# Altium PCB roneCPUBoard-v10.PcbDoc (part 1 of 3)
Units mil, origin at the board's own origin, x right, y up, seen from the top; angles counter-clockwise.
Board outline 3915.26 x 3915.56 mil, 2 copper layers (Top Layer, Bottom Layer); 196 components, 156 nets, 740 pads, 425 vias.
Unrouted connection lines stored in the file: 1.
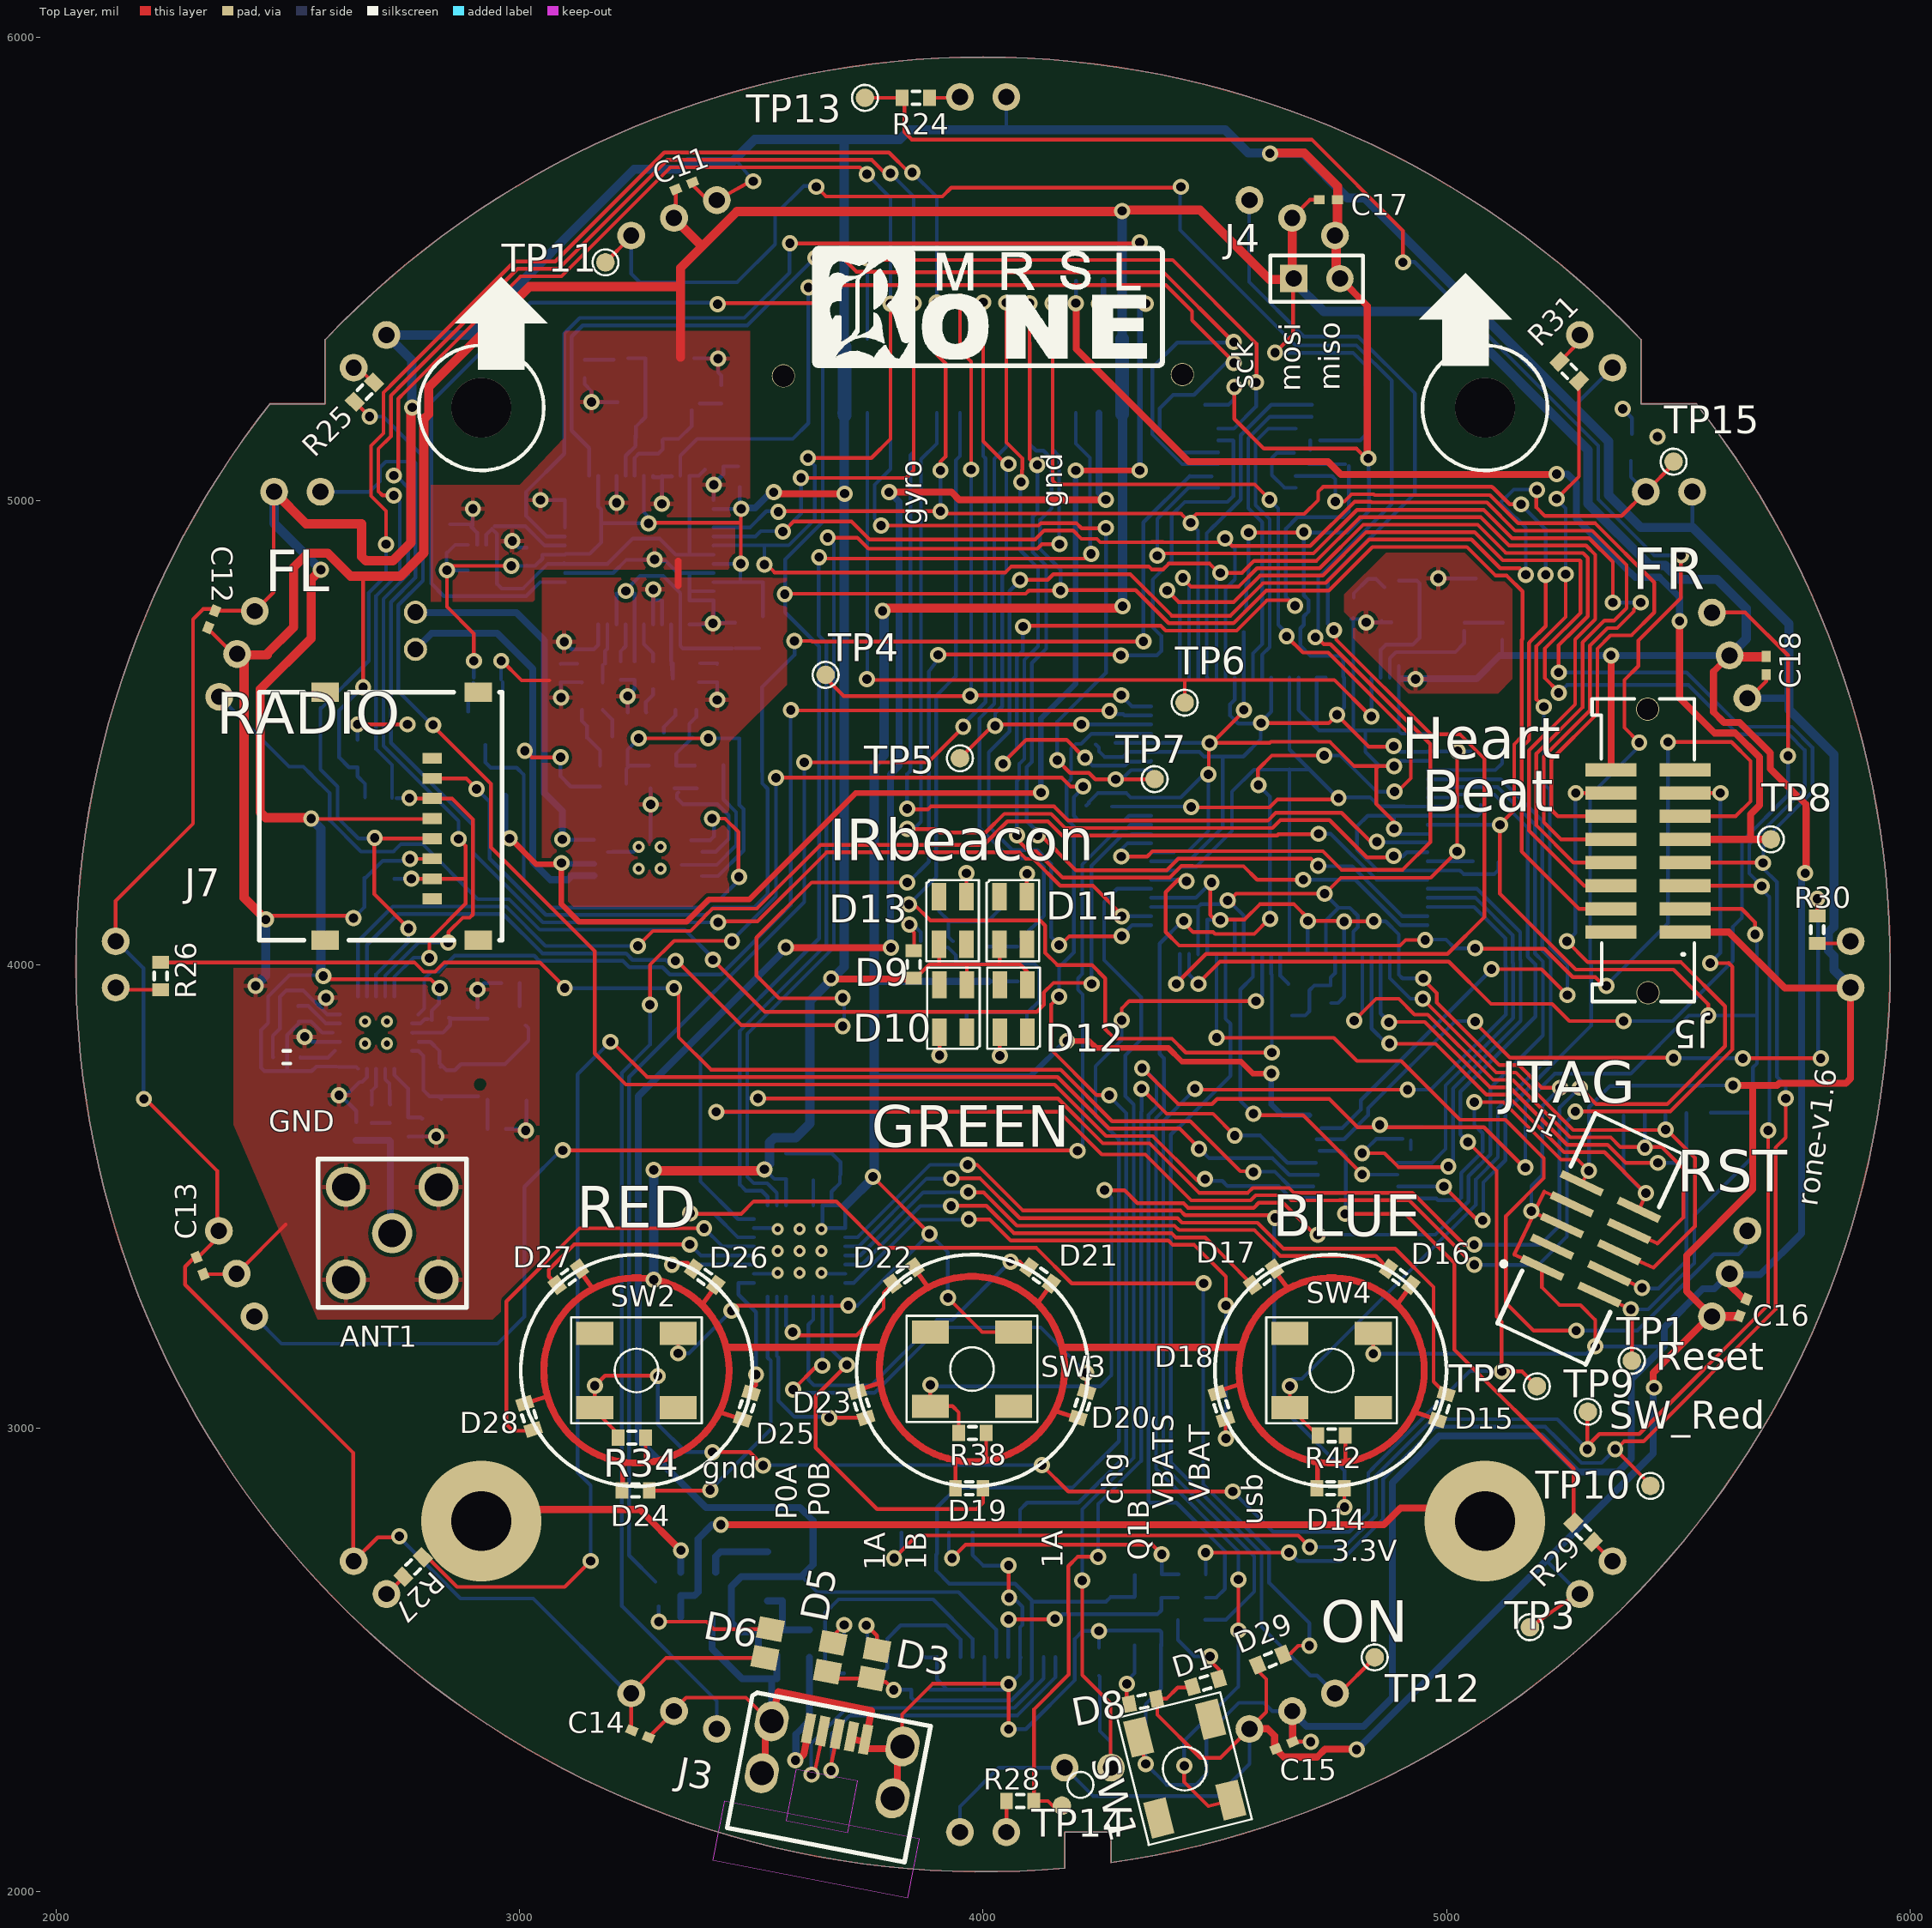
[diagram p0: Top Layer view]
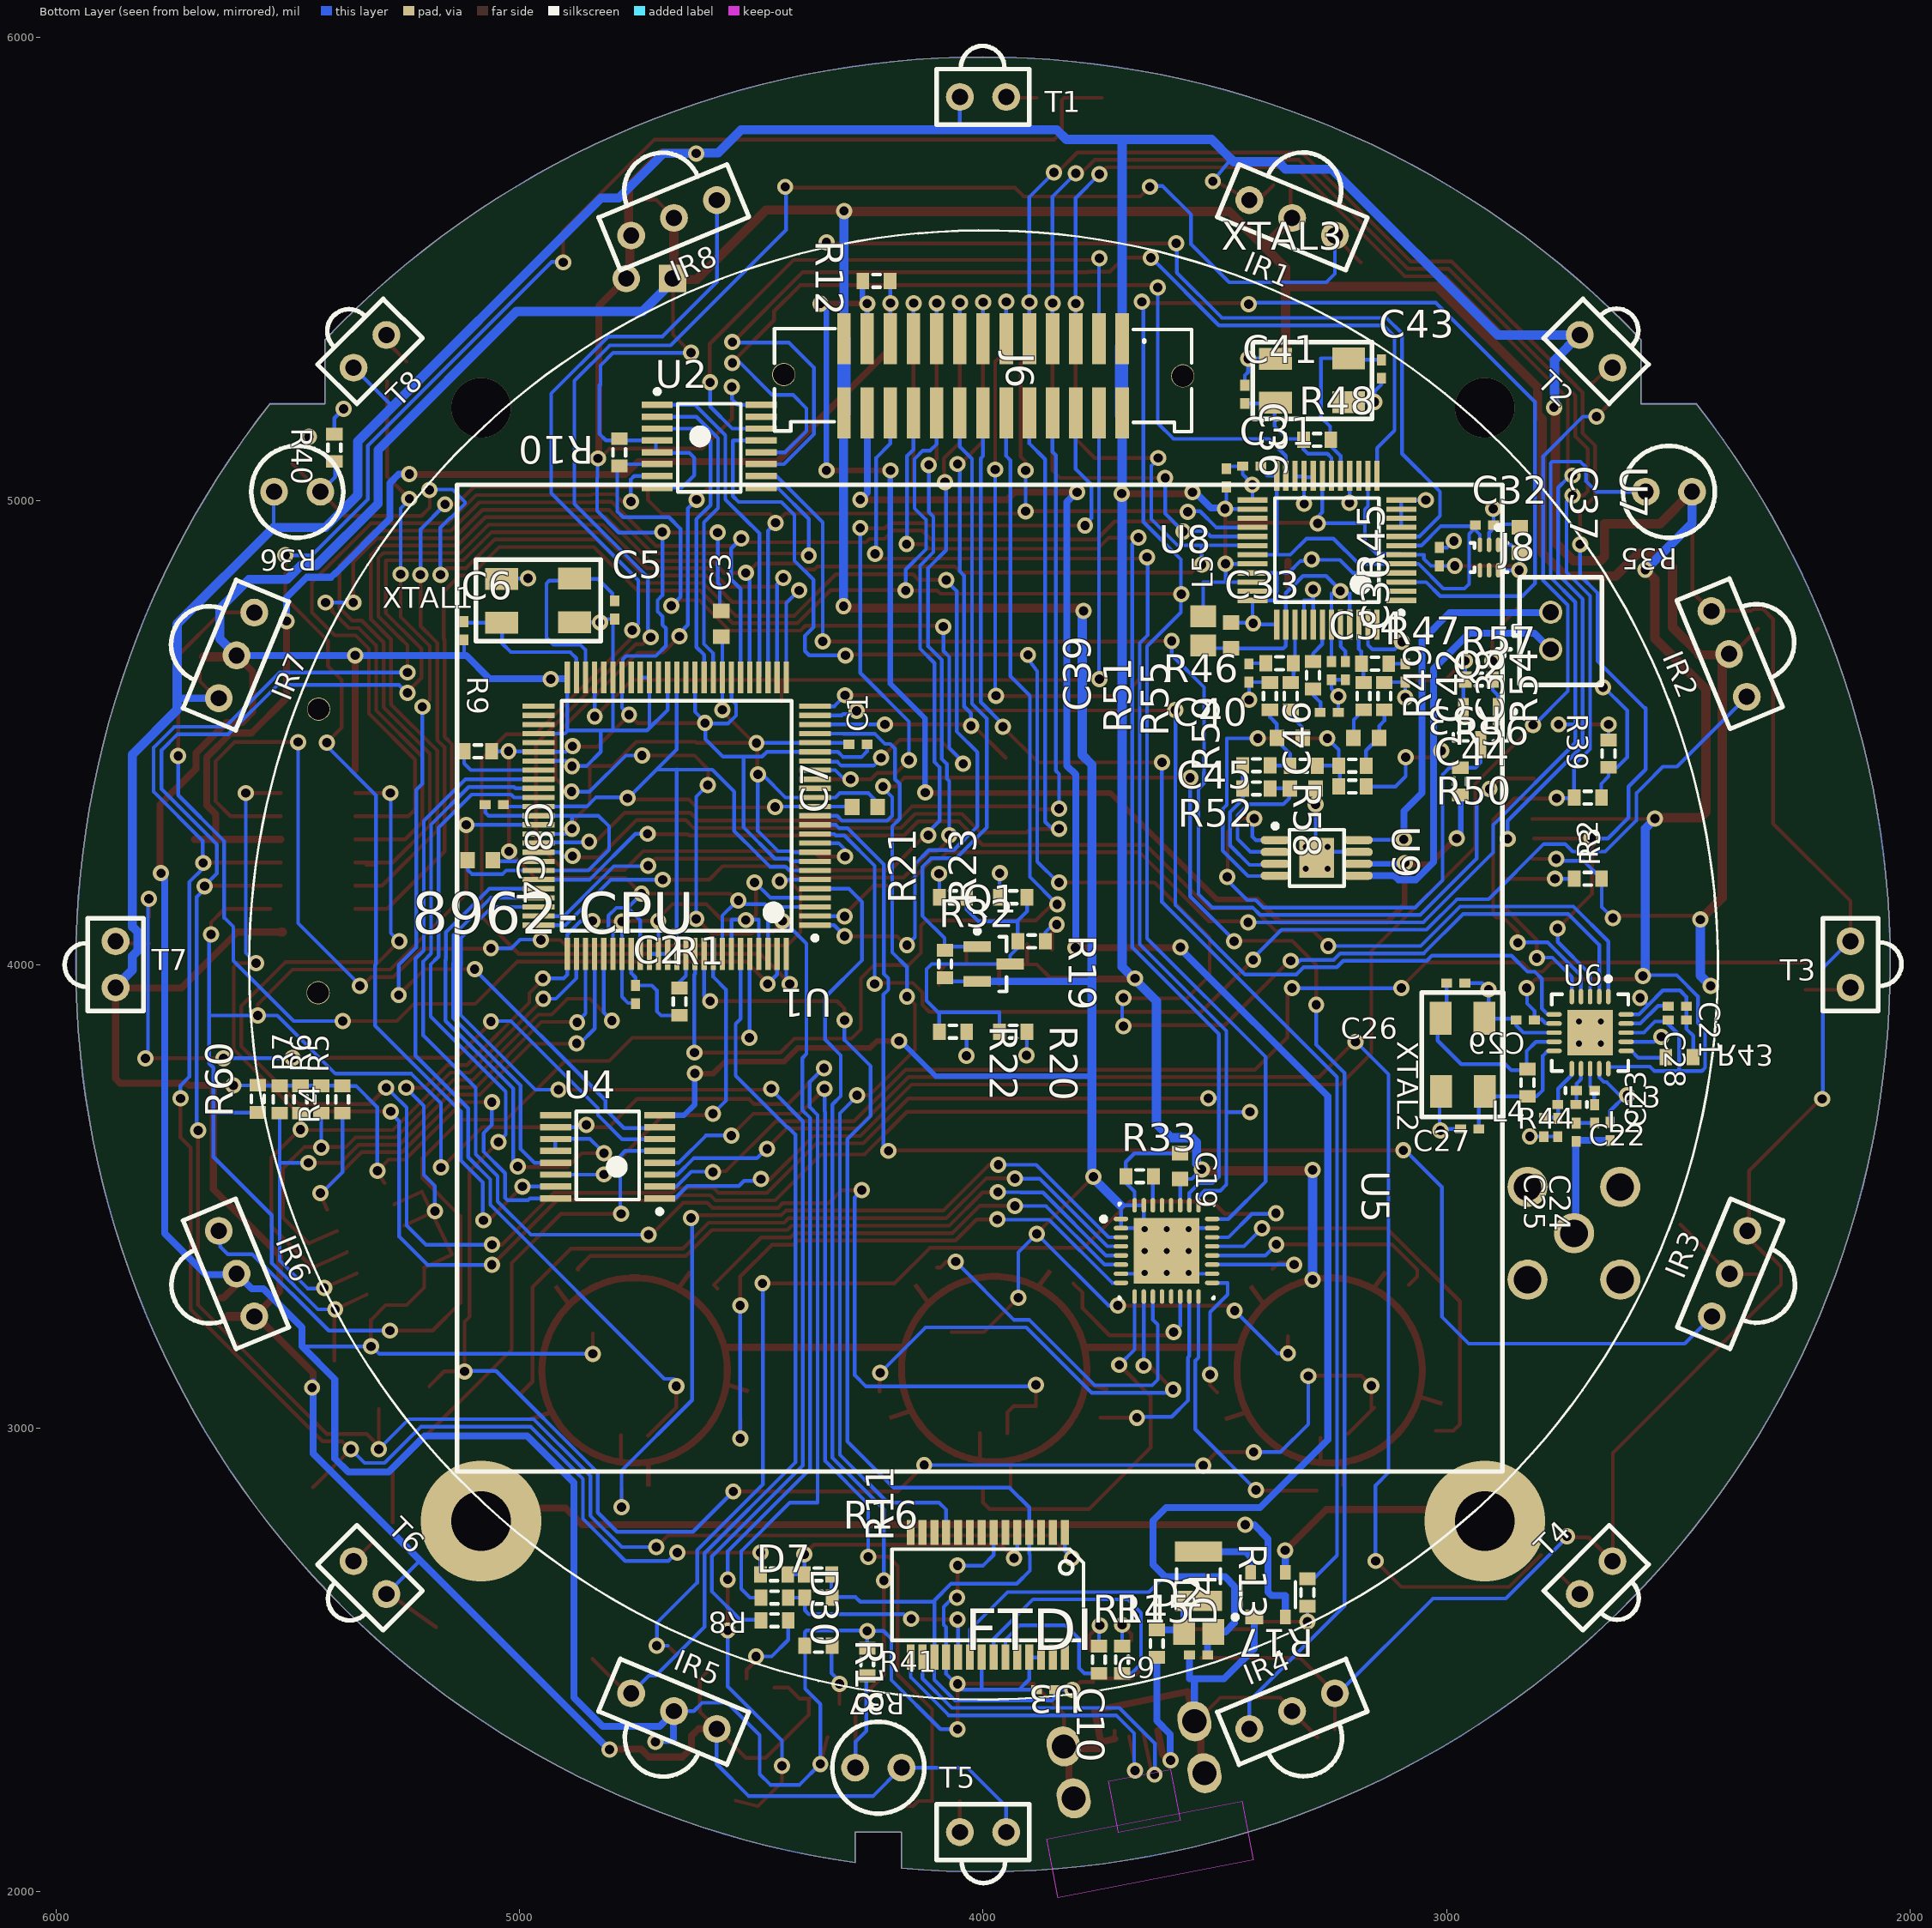
[diagram p1: Bottom Layer view, seen from below]

## Layer stack, top to bottom
Top Layer: signal copper 1.4
Dielectric: dielectric 12.6, FR-4, Dk 4.8
Bottom Layer: signal copper 1.4

## Board outline
4175.97,2050.22 cw(c4000,4000) 2460.99,5209.99 2461,5210 2580,5210 2580,5348 cw(c4000,4000) 5420,5348 5420,5210 5539,5210 5538.89,5209.9 cw(c4000,4000) 4275.99,2062 4276,2062 4276,2128 4176,2128

## Design rules (kind name [scope] priority, off if disabled: settings)
Clearance [All] p1: gap=8
PolygonConnect [All] p1: connectstyle=Relief reliefconductorwidth=10 reliefentries=4 polygonreliefangle="90 Angle"
RoomDefinition TestPoints [InComponentClass('TestPoints')] p1: confinementstyle=ConfineIn formatcopy=TRUE lockcomponents=FALSE outline 0,0 2000,0 2000,1000 0,1000
RoomDefinition USBHeaders [InComponentClass('USBHeaders')] p2: confinementstyle=ConfineIn formatcopy=TRUE lockcomponents=FALSE outline 0,0 2000,0 2000,1000 0,1000
RoomDefinition SoundChip [InComponentClass('SoundChip')] p3: confinementstyle=ConfineIn formatcopy=TRUE lockcomponents=FALSE outline 0,0 2000,0 2000,1000 0,1000
RoomDefinition Radio [InComponentClass('Radio')] p4: confinementstyle=ConfineIn formatcopy=TRUE lockcomponents=FALSE outline 0,0 2000,0 2000,1000 0,1000
RoomDefinition LightSensorsButtons [InComponentClass('LightSensorsButtons')] p5: confinementstyle=ConfineIn formatcopy=TRUE lockcomponents=FALSE outline 0,0 2000,0 2000,1000 0,1000
RoomDefinition LEDs [InComponentClass('LEDs')] p6: confinementstyle=ConfineIn formatcopy=TRUE lockcomponents=FALSE outline 0,0 2000,0 2000,1000 0,1000
RoomDefinition IRComms [InComponentClass('IRComms')] p7: confinementstyle=ConfineIn formatcopy=TRUE lockcomponents=FALSE outline 0,0 2000,0 2000,1000 0,1000
RoomDefinition CPU [InComponentClass('CPU')] p8: confinementstyle=ConfineIn formatcopy=TRUE lockcomponents=FALSE outline 0,0 2000,0 2000,1000 0,1000
RoutingVias [All] p1: holewidth=20 width=35 viastyle="Through Hole" minholewidth=20 minwidth=35 maxholewidth=20 maxwidth=35
SMDNeckDown [All] p1: percent=400.000
SilkscreenOverComponentPads [All] p1: minsilkscreentomaskgap=10
SolderMaskExpansion [All] p1: expansion=4
Width "Schematic Width Constraint_11" [InNet('5V_BOOST')] p1: maxlimit=20 minlimit=8 preferedwidth=15 minimp=50.000000 maximp=50.000000 favimp=50.000000
Width "Schematic Width Constraint_10" [InNet('GND')] p2: maxlimit=20 minlimit=8 preferedwidth=15 minimp=50.000000 maximp=50.000000 favimp=50.000000
Width "Schematic Width Constraint_9" [InNet('PRONG2')] p3: maxlimit=15 minlimit=8 preferedwidth=8 minimp=50.000000 maximp=50.000000 favimp=50.000000
Width "Schematic Width Constraint_8" [InNet('PRONG1')] p4: maxlimit=15 minlimit=8 preferedwidth=8 minimp=50.000000 maximp=50.000000 favimp=50.000000
Width "Schematic Width Constraint_6" [InNet('NetD2_1')] p5: maxlimit=15 minlimit=8 preferedwidth=8 minimp=50.000000 maximp=50.000000 favimp=50.000000
Width "Schematic Width Constraint_2" [InNet('NetD2_2')] p6: maxlimit=15 minlimit=8 preferedwidth=8 minimp=50.000000 maximp=50.000000 favimp=50.000000
Width "Schematic Width Constraint_1" [InNet('5VUSB')] p7: maxlimit=15 minlimit=8 preferedwidth=8 minimp=50.000000 maximp=50.000000 favimp=50.000000
Width "Schematic Width Constraint" [InNet('GND')] p8: maxlimit=15 minlimit=8 preferedwidth=8 minimp=50.000000 maximp=50.000000 favimp=50.000000
Width "Schematic Width Constraint_7" [InNet('3.3V')] p9: maxlimit=20 minlimit=8 preferedwidth=15 minimp=50.000000 maximp=50.000000 favimp=50.000000
Width "Schematic Width Constraint_5" [InNet('NetANT1_1')] p10: maxlimit=20 minlimit=8 preferedwidth=15 minimp=50.000000 maximp=50.000000 favimp=50.000000
Width "Schematic Width Constraint_4" [InNet('NetJ8_1')] p11: maxlimit=20 minlimit=8 preferedwidth=15 minimp=50.000000 maximp=50.000000 favimp=50.000000
Width "Schematic Width Constraint_3" [InNet('NetJ8_2')] p12: maxlimit=20 minlimit=8 preferedwidth=15 minimp=50.000000 maximp=50.000000 favimp=50.000000
Width [All] p13: maxlimit=8 minlimit=8 preferedwidth=8
27 further rules are at their usual default settings.

## Classes and differential pairs
component class TestPoints: TP2 TP3 TP4 TP5 TP6 TP7 TP8 TP9 TP10 TP11 TP12 TP13 TP14 TP15
component class USBHeaders: C9 C10 D2 D3 D4 D5 D6 D7 D8 D30 J2 J3 J4 J5 J6 J7 L1 Q? R11 R12 R13 R14 R15 R16 R17 R18 SW1 U3 VDDC
component class LightSensorsButtons: R34 R35 R36 R37 R38 R39 R40 R41 R42 SW2 SW3 SW4
component class IRComms: C11 C12 C13 C14 C15 C16 C17 C18 D9 D10 D11 D12 D13 IR1 IR2 IR3 IR4 IR5 IR6 IR7 IR8 Q1 R19 R20 R21 R22 R23 R24 R25 R26 R27 R28 R29 R30 R31 R32 T1 T2 T3 T4 T5 T6 T7 T8 U4 U10
component class CPU: C1 C2 C3 C4 C5 C6 C7 C8 D1 D? I2C IR_BEACON J1 "LED1 Power" "LED2 USB" "LED-H Blinky" LEDs R1 R2 R3 R4 R5 R6 R7 R8 R9 R10 R60 R? RST SPI SW? SW_RED TP1 U0 U1 U2 XTAL1 "XTAL 1"
component class LEDs: C19 D14 D15 D16 D17 D18 D19 D20 D21 D22 D23 D24 D25 D26 D27 D28 D29 R33 TP? U5
component class Radio: ANT1 C21 C22 C23 C24 C25 C26 C27 C28 C29 L2 L3 L4 R43 R44 U6 XTAL2
component class SoundChip: C30 C31 C32 C33 C34 C36 C37 C38 C39 C40 C41 C42 C43 C44 C45 C46 C? J8 L5 Q2 R45 R46 R47 R48 R49 R50 R51 R52 R53 R54 R55 R56 R57 R58 R59 U7 U8 U9 XTAL3 XTAL100

## Components (designator, comment, footprint, x,y, rotation, side; value= is the part's Value field where it differs from the comment)
ANT1 "Ant" AntennaSMA 2725,3420 r90 top locked
C1 "Cap Semi" CAPC1005L#1 4270,4475 r180 bottom
C2 "Cap Semi" CAPC1005L#1 4750,3935 r90 bottom
C3 "Cap Semi" CAPC1608L 4565,4735 r90 bottom
C4 "Cap Semi" CAPC1608L 5085,4225 r180 bottom
C5 "Cap Semi" CAPC1005L#1 4795,4765 r90 bottom
C6 "Cap Semi" CAPC1005L#1 5120,4720 r90 bottom
C7 "Cap Semi" CAPC1608L 4255,4340 r0 bottom
C8 "Cap Semi" CAPC1005L#1 5055,4345 r180 bottom
C9 "" CAPC1005L#1 3535,2510 r180 bottom
C10 "" CAPC1005L#1 3865,2435 r180 bottom
C11 "Cap Semi" CAPC1005L#1 3355,5680 r22.5 top
C12 "Cap Semi" CAPC1005L#1 2335,4745 r67.5 top
C13 "Cap Semi" CAPC1005L#1 2310,3350 r112.5 top
C14 "Cap Semi" CAPC1005L#1 3260,2340 r157.5 top
C15 "Cap Semi" CAPC1005L#1 4650,2315 r202.5 top
C16 "Cap Semi" CAPC1005L#1 5640,3260 r247.5 top
C17 "Cap Semi" CAPC1005L#1 4745,5650 r0 top
C18 "Cap Semi" CAPC1005L#1 5690,4645 r270 top
C19 "Cap Semi" CAPC1608L 3575,3565 r270 bottom
C21 "Cap Semi" CAPC1005L#1 2502,3910 r0 bottom
C22 "Cap Semi" CAPC1005L#1 2720,3638 r90 bottom
C23 "Cap Semi" CAPC1005L#1 2647,3640 r270 bottom
C24 "Cap Semi" CAPC1005L#1 2760,3648 r90 bottom
C25 "Cap Semi" CAPC1005L#1 2790,3648 r90 bottom
C26 "Cap Semi" CAPC1005L#1 2980,3960 r0 bottom
C27 "Cap Semi" CAPC1005L#1 2950,3645 r180 bottom
C28 "Cap Semi" CAPC1005L#1 2502,3880 r0 bottom
C29 "Cap Semi" CAPC1005L#2 2830,3880 r180 top
C30 "Cap Semi" CAPC1608L 2842,4916 r90 bottom
C31 "Cap Semi" CAPC1005L#1 3420,5075 r180 bottom
C32 "Cap Semi" CAPC1005L#1 2918,4948 r0 bottom
C33 "Cap Semi" CAPC1608L 3465,4710 r90 bottom
C34 "Cap Semi" CAPC1005L#1 3248,4634 r90 bottom
C36 "Cap Semi" CAPC1005L#1 3475,5050 r270 bottom
C37 "Cap Semi" CAPC1005L#1 3015,4880 r270 bottom
C38 "Cap Semi" CAPC1005L#1 3089,4629 r270 bottom
C39 "Cap Semi" CAPC1005L#1 3426,4629 r270 bottom
C40 "Cap Semi" CAPC1005L#1 3253,4544 r180 bottom
C41 "Cap Semi" CAPC1005L#1 3435,5230 r90 bottom
C42 "Cap Semi" CAPC1005L#1 3218,4634 r90 bottom
C43 "Cap Semi" CAPC1005L#1 3140,5285 r270 bottom
C44 "Cap Semi" CAPC1608L 3173,4489 r0 bottom
C45 "Cap Semi" CAPC1608L 3338,4489 r180 bottom
C46 "Cap Semi" CAPC1608L 3310,4380 r0 bottom
D1 "heartbeat (white)" SurfaceMount(603) 4480,2450 r16.7 top
D2 "Diode" SurfaceMount(603) 3625,2535 r270 bottom
D3 "TXLED" INDC2012L 3765,2490 r79.1 top
D4 "DIODE_ARRAY" SOT143 3385,2640 r90 bottom
D5 "RXLED" INDC2012L 3670,2505 r79.1 top
D6 "Charge" INDC2012L 3535,2535 r79.1 top
D7 "Diode" SurfaceMount(603) 4450,2634 r180 bottom
D8 "LED" SurfaceMount(603) 4345,2410 r190.9 top
D9 "BEACON_PILOT" SurfaceMount(603) 3850,4000 r90 top locked
D10 "IRBeacon" IRBeacon 3935,3905 r0 top locked
D11 "IRBeacon" IRBeacon 4065,4095 r180 top locked
D12 "IRBeacon" IRBeacon 4065,3905 r0 top locked
D13 "IRBeacon" IRBeacon 3935,4095 r180 top locked
D14 "blue" SurfaceMount(603) 4750,2870 r0 top locked
D15 "blue" SurfaceMount(603) 4990,3045 r72 top locked
D16 "blue" SurfaceMount(603) 4899,3326 r144 top locked
D17 "blue" SurfaceMount(603) 4605,3326 r216 top locked
D18 "blue" SurfaceMount(603) 4514,3047 r288 top locked
D19 "green" SurfaceMount(603) 3970,2870 r0 top locked
D20 "green" SurfaceMount(603) 4214,3050 r72 top locked
D21 "green" SurfaceMount(603) 4123,3329 r144 top locked
D22 "green" SurfaceMount(603) 3829,3329 r216 top locked
D23 "green" SurfaceMount(603) 3738,3050 r288 top locked
D24 "red" SurfaceMount(603) 3250,2865 r0 top locked
D25 "red" SurfaceMount(603) 3490,3047 r72 top locked
D26 "red" SurfaceMount(603) 3399,3326 r144 top locked
D27 "red" SurfaceMount(603) 3105,3326 r216 top locked
D28 "red" SurfaceMount(603) 3020,3025 r288 top locked
D29 "LED_MSP430" SurfaceMount(603) 4620,2500 r22.5 top
D30 "Diode" SurfaceMount(603) 4451,2684 r180 bottom
IR1 "GP1UX31QS" GP1UX31QS 3333,5611 r292.5 bottom locked
IR2 "GP1UX31QS" GP1UX31QS 2390,4670 r337.5 bottom locked
IR3 "GP1UX31QS" GP1UX31QS 2389,3333 r22.5 bottom locked
IR4 "GP1UX31QS" GP1UX31QS 3333,2389 r67.5 bottom locked
IR5 "GP1UX31QS" GP1UX31QS 4667,2389 r112.5 bottom locked
IR6 "GP1UX31QS" GP1UX31QS 5611,3333 r157.5 bottom locked
IR7 "GP1UX31QS" GP1UX31QS 5611,4667 r202.5 bottom locked
IR8 "GP1UX31QS" GP1UX31QS 4667,5611 r247.5 bottom locked
J1 "JTAG" JTAG-10 5311,3408 r245 top locked
J3 "USB" "USB Minib (thru-hole)" 3685,2340 r79.1 top
J4 "External Power" HDR1X2 4670,5480 r0 top
J5 "HEADER 8X2" "HEADERSM 8X2" 5435,4245 r180 top locked
J6 "HCOMM/MOT" "HeaderSM 13x2" 4000,5270 r270 bottom locked
J7 "Micro_SD" MICRO_SD 2700,4320 r90 top locked
J8 "Speaker" BatteryConnJST 2775,4720 r90 bottom
L1 "Inductor" INDC2012L 3535,2560 r180 bottom
L2 "Inductor" INDC1005AL 2680,3678 r270 bottom
L3 "Inductor" INDC1005AL 2700,3728 r180 bottom
L4 "Inductor" INDC1005AL 2740,3698 r0 bottom
L5 "Inductor" INDC2012L 3525,4720 r90 bottom
Q1 "Mosfet" SOT-23 3977,4001 r180 bottom
Q2 "Mosfet" SOT-23 2926,4510 r270 bottom
R1 "Res3" RESC1608L#1 4655,3920 r90 bottom
R2 "Res3" RESC1608L#1 2695,4185 r0 bottom
R3 "Res3" RESC1608L#1 2695,4360 r0 bottom
R4 "Res3" RESC1608L#1 5383,3709 r90 bottom
R5 "Res3" RESC1608L#1 5428,3709 r90 bottom
R6 "Res3" RESC1608L#1 5473,3709 r90 bottom
R7 "Res3" RESC1608L#1 5518,3709 r90 bottom
R8 "Res3" RESC1608L#1 4450,2585 r180 bottom
R9 "Res3" RESC1608L#1 5090,4460 r180 bottom
R10 "Res3" RESC1608L#1 4785,5105 r270 bottom
R11 "Res3" RESC1608L#1 4356,2684 r0 bottom
R12 "Res3" RESC1608L#1 4230,5475 r180 bottom
R13 "Res3" RESC3225L 3535,2680 r270 bottom
R14 "" RESC1608L#1 3750,2500 r90 bottom
R15 "" RESC1608L#1 3700,2500 r90 bottom
R16 "Res3" RESC1608L#1 4355,2634 r0 bottom
R17 "Res3" RESC1608L#1 3300,2645 r270 bottom
R18 "Res3" RESC1608L#1 4355,2530 r180 bottom
R19 "Res3" RESC1608L#1 3895,4050 r180 bottom
R20 "Res3" RESC1608L#1 3935,3855 r180 bottom
R21 "Res3" RESC1608L#1 4065,4145 r0 bottom
R22 "Res3" RESC1608L#1 4065,3855 r180 bottom
R23 "Res3" RESC1608L#1 3935,4145 r0 bottom
R24 "Res3" RESC1608L#1 3855,5870 r180 top
R25 "Res3" RESC1608L#1 2665,5235 r225 top
R26 "Res3" RESC1608L#1 2225,3975 r90 top
R27 "Res3" RESC1608L#1 2770,2700 r45 top
R28 "Res3" RESC1608L#1 4080,2195 r0 top
R29 "Res3" RESC1608L#1 5295,2775 r135 top
R30 "Res3" RESC1608L#1 5800,4075 r90 top
R31 "Res3" RESC1608L#1 5265,5280 r315 top
R32 "Res3" RESC1608L#1 4082,4001 r90 bottom
R33 "Res3" RESC1608L#1 3662,3543 r180 bottom
R34 "Res3" RESC1608L#1 3242,2979 r0 top
R35 "photoresistor" photoresistor 2520,5020 r90 bottom locked
R36 "photoresistor" photoresistor 5480,5020 r270 bottom locked
R37 "photoresistor" photoresistor 4226,2267 r90 bottom locked
R38 "Res3" RESC1608L#1 3977,2989 r0 top
R39 "Res3" RESC1608L#1 2650,4455 r270 bottom
R40 "Res3" RESC1608L#1 5400,5115 r90 bottom
R41 "Res3" RESC1608L#1 4250,2495 r90 bottom
R42 "Res3" RESC1608L#1 4752,2984 r0 top
R43 "Res3" RESC1608L#2 2497,3800 r0 top
R44 "Res3" RESC1608L#1 2825,3745 r270 bottom
R45 "Res3" RESC1608L#1 3154,4649 r180 bottom
R46 "Res3" RESC1608L#1 3360,4650 r0 bottom
R47 "Res3" RESC1608L#1 3288,4624 r270 bottom
R48 "Res3" RESC1608L#1 3279,5132 r0 bottom
R49 "Res3" RESC1608L#1 3179,4579 r270 bottom
R50 "Res3" RESC1608L#1 3203,4429 r0 bottom
R51 "Res3" RESC1608L#1 3336,4579 r270 bottom
R52 "Res3" RESC1608L#1 3308,4429 r180 bottom
R53 "Res3" RESC1608L#1 3203,4384 r0 bottom
R54 "Res3" RESC1608L#1 3134,4579 r270 bottom
R55 "Res3" RESC1608L#1 3381,4579 r270 bottom
R56 "Res3" RESC1608L#1 2970,4395 r270 bottom
R57 "Res3" RESC1608L#1 2930,4615 r180 bottom
R58 "Diff" RESC1608L#1 3410,4380 r180 bottom
R59 "Diff" RESC1608L#1 3410,4430 r0 bottom
R60 "Res3" RESC1608L#1 5565,3710 r90 bottom
SW1 "PWR_BUTTON" SwitchTall-TL330 4435,2265 r104 top locked
SW2 "SW_RED" SwitchTall-TL330 3252,3124 r0 top locked
SW3 "SW_GREEN" SwitchTall-TL330 3976,3127 r0 top locked
SW4 "SW_BLUE" SwitchTall-TL330 4752,3124 r0 top locked
T1 "LN54" LN54 4000,5872 r270 bottom locked
T2 "LN54" LN54 2677,5323 r315 bottom locked
T3 "LN54" LN54 2128,4000 r0 bottom locked
T4 "LN54" LN54 2677,2677 r45 bottom locked
T5 "LN54" LN54 4000,2128 r90 bottom locked
T6 "LN54" LN54 5323,2677 r135 bottom locked
T7 "LN54" LN54 5872,4000 r180 bottom locked
T8 "LN54" LN54 5323,5323 r225 bottom locked
TP1 "Reset" TestPoint#1 5400,3145 r0 top
TP2 "RED SW" TestPoint#1 5195,3090 r90 top
TP3 "3.3V" TestPoint#1 5180,2570 r90 top
TP4 "QEI_0A" TestPoint#1 3660,4625 r90 top
TP5 "QEI_0B" TestPoint#1 3950,4445 r90 top
TP6 "MOT0_PWMA" TestPoint#1 4435,4565 r90 top
TP7 "MOT0_PWMB" TestPoint#1 4370,4400 r90 top
TP8 "VBAT" TestPoint#1 5700,4270 r90 top
TP9 "FTDI_RX" TestPoint#1 5305,3035 r90 top
TP10 "FTDI_TX" TestPoint#1 5440,2875 r90 top
TP11 "IR_RECV_0" TestPoint#1 3185,5515 r90 top
TP12 "IR_RECV_4" TestPoint#1 4845,2505 r90 top
TP13 "IR_EMIT_0" TestPoint#1 3745,5870 r90 top
TP14 "IR_EMIT_4" TestPoint#2 4210,2230 r90 top
TP15 "LIGHT_FR" TestPoint#1 5490,5085 r90 top
U1 "LM3S8962" LQFP-100 4661,4321 r0 bottom locked
U2 "DEMUX" TSSOP-16 4591,5118 r180 bottom locked
U3 "FT232RL" SSOP-28 3990,2640 r0 bottom locked
U4 "SN74AHCT595" TSSOP-16 4810,3585 r0 bottom locked
U5 "TI_LED_DRIVER" QFN32-LEDTLC59116 3604,3382 r180 bottom locked
U6 "nRF24L01P" QFN-20 2690,3853 r270 bottom locked
U7 "1.8V LDO" WFDFN-6 2908,4878 r270 bottom
U8 "VS1053" LQFP-48 3258,4894 r0 bottom locked
U9 "TPA741" "audio amp" 3280,4230 r180 bottom
XTAL1 "8mhz" CRYSTAL 4960,4785 r0 bottom locked
XTAL2 "16mhz" CRYSTAL 2965,3805 r270 bottom
XTAL3 "12.288mhz" CRYSTAL 3290,5260 r180 bottom

## Footprints (in the part's own frame and the unit in brackets; to place one, negate y for a bottom-side part, rotate by r counter-clockwise, add the part's x,y. Pads: shape width x height; smd on the part's side, far side on the other; paste and mask are expansions set on the pad)
AntennaSMA [mm] "antenna for radios , tyco 108-11200"
  round 2.2 hole 1.511: 1(0.002,0.01) 2(-2.54,2.54) 3(2.54,2.54) 4(2.54,-2.54) 5(-2.54,-2.54)
  silkscreen extent -4.06,-4.06 4.06,4.06
"audio amp" [mm]
  oval 1.6x0.45 smd: 1(-2.275,0.975) 2(-2.275,0.325) 3(-2.275,-0.325) 4(-2.275,-0.975) 5(2.275,-0.975) 6(2.275,-0.325) 7(2.275,0.325) 8(2.275,0.975)
  rect 1.9x2.2 smd: 9(0,0)
  silkscreen extent -2.4,-1.55 1.5,1.87, body extent -1.55,-1.45 1.55,1.45, height 1.1
BatteryConnJST [mil] "Connector for Battery"
  round 50 hole 35: 1(-40,0) 2(40,0)
  silkscreen extent -117,-110 116,115
CAPC1005L#1 [mm] "Chip Capacitor, Body 1.0x0.5mm, IPC High Density"
  rect 0.6x0.5 smd: 1(-0.5,0) 2(0.5,0)
  body extent -0.55,-0.3 0.55,0.3, height 1.3
CAPC1005L#2 [mm] "Chip Capacitor, Body 1.0x0.5mm, IPC High Density"
  rect 0.6x0.5 smd far side: 1(-0.5,0) 2(0.5,0)
  body extent -0.55,-0.3 0.55,0.3, height 1.3
CAPC1608L [mm] "Chip Capacitor, Body 1.6x0.8mm, IPC High Density"
  rect 0.8x0.9 smd: 1(-0.7,0) 2(0.7,0)
  body extent -0.87,-0.48 0.87,0.48, height 1.3
CRYSTAL [mm]
  rect 1.8x1.2 smd: 1(-2,-1.213) 2(2,-1.187) 3(2,1.213) 4(-2,1.187)
  silkscreen extent -3.42,-2.24 3.41,2.22
GP1UX31QS [mil]
  round 60 hole 35: 1(0,100) 2(0,0) 3(0,-100)
  silkscreen extent -146,-150 60,150
HDR1X2 [mm] "Connector; Header; 2 Position"
  rect 1.5x1.5 hole 0.9: 1(0,0)
  round 1.5 hole 0.9: 2(2.54,0)
  silkscreen extent -1.27,-1.27 3.81,1.27
"HEADERSM 8X2" [mm]
  rect 2.795x0.74 smd: 1(-2.033,4.445) 2(2.033,4.445) 3(-2.033,3.175) 4(2.033,3.175) 5(-2.033,1.905) 6(2.033,1.905) 7(-2.033,0.635) 8(2.033,0.635) 9(-2.033,-0.635) 10(2.033,-0.635) 11(-2.033,-1.905) 12(2.033,-1.905) 13(-2.033,-3.175) 14(2.033,-3.175) 15(-2.033,-4.445) 16(2.033,-4.445)
  round 1.27 hole 1.19: c1(0,7.773) c2(0.025,-7.773)
  Top Layer lines w0.2: 3.048,0.66 3.15,0.762 2.642,0.762
  Mechanical 13 keep-out lines w0.2: 2.591,-1.346 2.591,-4.826
  silkscreen extent -2.54,-8.33 3.07,8.25
"HeaderSM 13x2" [mm]
  rect 2.795x0.74 smd: 1(-2.033,7.62) 2(2.033,7.62) 3(-2.033,6.35) 4(2.033,6.35) 5(-2.033,5.08) 6(2.033,5.08) 7(-2.033,3.81) 8(2.033,3.81) 9(-2.033,2.54) 10(2.033,2.54) 11(-2.033,1.27) 12(2.033,1.27) 13(-2.033,0) 14(2.033,0) 15(-2.033,-1.27) 16(2.033,-1.27) 17(-2.033,-2.54) 18(2.033,-2.54) 19(-2.033,-3.81) 20(2.033,-3.81) 21(-2.033,-5.08) 22(2.033,-5.08) 23(-2.033,-6.35) 24(2.033,-6.35) 25(-2.033,-7.62) 26(2.033,-7.62)
  round 1.27 hole 1.19: c1(0,10.948) c2(-0.076,-10.922)
  silkscreen extent -2.59,-11.43 3.06,11.43
INDC1005AL [mm] "Chip Inductor, Body 1.0x0.5mm, IPC High Density"
  rect 0.6x0.5 smd: 1(-0.5,0) 2(0.5,0)
  silkscreen extent -1.1,-0.15 -1.1,0.15, body extent -0.55,-0.3 0.55,0.3, height 0.55
INDC2012L [mm] "Chip Inductor, Body 2.0x1.2mm, IPC High Density"
  rect 1.2x1.4 smd: 1(-0.8,0) 2(0.8,0)
  body extent -1.1,-0.7 1.1,0.7, height 0.55
IRBeacon [mm]
  rect 0.8x1.5 smd: 1(-0.738,1.3) 2(0.762,-1.3) 3(-0.738,-1.3) 4(0.762,1.3)
  silkscreen extent -1.42,-2.21 1.46,2.24
JTAG-10 [mm] "Connector, Socket Strip, Double Row, SMT, 20 Position, Vertical, Pitch 2mm, Body 20 x 4 mm (LxW)"
  rect 0.44x2.5 smd: 1(-2.56,-1.73) 2(-2.56,1.73) 3(-1.28,-1.73) 4(-1.28,1.73) 5(0,-1.73) 6(0,1.73) 7(1.28,-1.73) 8(1.28,1.73) 9(2.56,-1.73) 10(2.56,1.73)
  silkscreen extent -6.35,-3.86 6.35,2.67, body extent -6.35,-2.01 6.35,2.03, height 3.56
LN54 [mil]
  round 60 hole 35: 1(0,50) 2(0,-50)
  silkscreen extent -110,-100 60,100
LQFP-48 [mm] "sound chip (9x9mm)"
  rect 1.65x0.29 smd: 1(-4.075,2.75) 2(-4.075,2.25) 3(-4.075,1.75) 4(-4.075,1.25) 5(-4.075,0.75) 6(-4.075,0.25) 7(-4.075,-0.25) 8(-4.075,-0.75) 9(-4.075,-1.25) 10(-4.075,-1.75) 11(-4.075,-2.25) 12(-4.075,-2.75) 25(4.075,-2.75) 26(4.075,-2.25) 27(4.075,-1.75) 28(4.075,-1.25) 29(4.075,-0.75) 30(4.075,-0.25) 31(4.075,0.25) 32(4.075,0.75) 33(4.075,1.25) 34(4.075,1.75) 35(4.075,2.25) 36(4.075,2.75)
  rect 0.29x1.65 smd: 13(-2.75,-4.075) 14(-2.25,-4.075) 15(-1.75,-4.075) 16(-1.25,-4.075) 17(-0.75,-4.075) 18(-0.25,-4.075) 19(0.25,-4.075) 20(0.75,-4.075) 21(1.25,-4.075) 22(1.75,-4.075) 23(2.25,-4.075) 24(2.75,-4.075) 37(2.75,4.075) 38(2.25,4.075) 39(1.75,4.075) 40(1.25,4.075) 41(0.75,4.075) 42(0.25,4.075) 43(-0.25,4.075) 44(-0.75,4.075) 45(-1.25,4.075) 46(-1.75,4.075) 47(-2.25,4.075) 48(-2.75,4.075)
  silkscreen extent -4.2,-2.85 2.85,3.57, body extent -3.5,-3.5 3.5,3.5, height 1.6
LQFP-100 [mm] "100-Pin LQFP Package"
  rect 1.75x0.29 smd: 1(-7.575,6) 2(-7.575,5.5) 3(-7.575,5) 4(-7.575,4.5) 5(-7.575,4) 6(-7.575,3.5) 7(-7.575,3) 8(-7.575,2.5) 9(-7.575,2) 10(-7.575,1.5) 11(-7.575,1) 12(-7.575,0.5) 13(-7.575,0) 14(-7.575,-0.5) 15(-7.575,-1) 16(-7.575,-1.5) 17(-7.575,-2) 18(-7.575,-2.5) 19(-7.575,-3) 20(-7.575,-3.5) 21(-7.575,-4) 22(-7.575,-4.5) 23(-7.575,-5) 24(-7.575,-5.5) 25(-7.575,-6) 51(7.575,-6) 52(7.575,-5.5) 53(7.575,-5) 54(7.575,-4.5) 55(7.575,-4) 56(7.575,-3.5) 57(7.575,-3) 58(7.575,-2.5) 59(7.575,-2) 60(7.575,-1.5) 61(7.575,-1) 62(7.575,-0.5) 63(7.575,0) 64(7.575,0.5) 65(7.575,1) 66(7.575,1.5) 67(7.575,2) 68(7.575,2.5) 69(7.575,3) 70(7.575,3.5) 71(7.575,4) 72(7.575,4.5) 73(7.575,5) 74(7.575,5.5) 75(7.575,6)
  rect 0.29x1.75 smd: 26(-6,-7.575) 27(-5.5,-7.575) 28(-5,-7.575) 29(-4.5,-7.575) 30(-4,-7.575) 31(-3.5,-7.575) 32(-3,-7.575) 33(-2.5,-7.575) 34(-2,-7.575) 35(-1.5,-7.575) 36(-1,-7.575) 37(-0.5,-7.575) 38(0,-7.575) 39(0.5,-7.575) 40(1,-7.575) 41(1.5,-7.575) 42(2,-7.575) 43(2.5,-7.575) 44(3,-7.575) 45(3.5,-7.575) 46(4,-7.575) 47(4.5,-7.575) 48(5,-7.575) 49(5.5,-7.575) 50(6,-7.575) 76(6,7.575) 77(5.5,7.575) 78(5,7.575) 79(4.5,7.575) 80(4,7.575) 81(3.5,7.575) 82(3,7.575) 83(2.5,7.575) 84(2,7.575) 85(1.5,7.575) 86(1,7.575) 87(0.5,7.575) 88(0,7.575) 89(-0.5,7.575) 90(-1,7.575) 91(-1.5,7.575) 92(-2,7.575) 93(-2.5,7.575) 94(-3,7.575) 95(-3.5,7.575) 96(-4,7.575) 97(-4.5,7.575) 98(-5,7.575) 99(-5.5,7.575) 100(-6,7.575)
  silkscreen extent -7.7,-6.3 6.3,6.82, body extent -7,-7 7,7, height 1.6
MICRO_SD [mm]
  rect 0.6x1.05 smd: 1(3.17,-2.82) 2(2.07,-2.82) 3(0.97,-2.82) 4(-0.13,-2.82) 5(-1.23,-2.82) 6(-2.33,-2.82) 7(-3.43,-2.82) 8(-4.53,-2.82)
  rect 1.05x1.5 smd: ""(-6.8,-5.35) ""(-6.8,3.05) ""(6.8,-5.35) ""(6.8,3.05)
  silkscreen extent -6.8,-6.65 6.8,6.65
photoresistor [mil]
  round 60 hole 35: 1(0,50) 2(0,-50)
  silkscreen extent -99,-99 99,99
QFN32-LEDTLC59116 [mm] "QFN, 32-Leads, Body 5.2x5.2mm (max), Pitch 0.50mm, IPC Medium Density"
  oval 0.8x0.25 smd: 1(-2.5,1.75) 2(-2.5,1.25) 3(-2.5,0.75) 4(-2.5,0.25) 5(-2.5,-0.25) 6(-2.5,-0.75) 7(-2.5,-1.25) 8(-2.5,-1.75) 17(2.5,-1.75) 18(2.5,-1.25) 19(2.5,-0.75) 20(2.5,-0.25) 21(2.5,0.25) 22(2.5,0.75) 23(2.5,1.25) 24(2.5,1.75)
  oval 0.25x0.8 smd: 9(-1.75,-2.5) 10(-1.25,-2.5) 11(-0.75,-2.5) 12(-0.25,-2.5) 13(0.25,-2.5) 14(0.75,-2.5) 15(1.25,-2.5) 16(1.75,-2.5) 25(1.75,2.5) 26(1.25,2.5) 27(0.75,2.5) 28(0.25,2.5) 29(-0.25,2.5) 30(-0.75,2.5) 31(-1.25,2.5) 32(-1.75,2.5)
  rect 3.6x3.6 smd: 33(0,0)
  silkscreen extent -3.58,-2.6 2.6,2.6, body extent -2.58,-2.57 2.57,2.58, height 1
QFN-20 [mm] "QFN, 20-Leads, Body 4.2x4.2mm (max), Pitch 0.50mm, IPC Medium Density"
  oval 0.85x0.25 smd: 1(-1.975,1) 2(-1.975,0.5) 3(-1.975,0) 4(-1.975,-0.5) 5(-1.975,-1) 11(1.975,-1) 12(1.975,-0.5) 13(1.975,0) 14(1.975,0.5) 15(1.975,1)
  oval 0.25x0.85 smd: 6(-1,-1.975) 7(-0.5,-1.975) 8(0,-1.975) 9(0.5,-1.975) 10(1,-1.975) 16(1,1.975) 17(0.5,1.975) 18(0,1.975) 19(-0.5,1.975) 20(-1,1.975)
  rect 2.5x2.5 smd: 21(0,0)
  silkscreen extent -3.07,-2.1 2.1,2.1, body extent -2.07,-2.07 2.07,2.07, height 0.8
RESC1608L#1 [mm] "Chip Resistor, Body 1.6x0.8mm, IPC High Density"
  rect 0.7x0.9 smd: 1(-0.75,0) 2(0.75,0)
  silkscreen extent -0.2,-0.35 0.2,0.35, body extent -0.85,-0.48 0.85,0.48, height 0.9
RESC1608L#2 [mm] "Chip Resistor, Body 1.6x0.8mm, IPC High Density"
  rect 0.7x0.9 smd far side: 1(-0.75,0) 2(0.75,0)
  silkscreen extent -0.2,-0.35 0.2,0.35, body extent -0.85,-0.48 0.85,0.48, height 0.9
RESC3225L [mm] "Chip Resistor, Body 3.2x2.5mm, IPC High Density"
  rect 1.1x2.6 smd: 1(-1.35,0) 2(1.35,0)
  silkscreen extent -0.4,-1.2 0.4,1.2, body extent -1.68,-1.32 1.68,1.32, height 0.9
SOT143 [mm] "SOT143, 4-Leads, Body 3.0x2.5mm (max), Pitch 1.90mm, IPC Medium Density"
  rect 0.8x1 smd: 1(-1.225,0.75)
  rect 0.8x0.6 smd: 2(-1.225,-0.95) 3(1.225,-0.95) 4(1.225,0.95)
  silkscreen extent -1.35,-1.5 0.7,1.93, body extent -0.7,-1.5 0.7,1.5, height 1.1
SOT-23 [mm] "SOT23, 3-Leads, Body 3.0x2.5mm (max), Pitch 0.95mm, IPC Medium Density"
  rect 1.5x0.6 smd: 1(-0.9,0.95) 2(-0.9,-0.95) 3(0.9,0)
  silkscreen extent -1.03,-1.5 0.7,1.92, body extent -0.7,-1.5 0.7,1.5, height 1.2
SSOP-28 [mm]
  rect 0.44x1.37 smd: 1(-4.225,-3.415) 2(-3.575,-3.415) 3(-2.925,-3.415) 4(-2.275,-3.415) 5(-1.625,-3.415) 6(-0.975,-3.415) 7(-0.325,-3.415) 8(0.325,-3.415) 9(0.975,-3.415) 10(1.625,-3.415) 11(2.275,-3.415) 12(2.925,-3.415) 13(3.575,-3.415) 14(4.225,-3.415) 15(4.225,3.415) 16(3.575,3.415) 17(2.925,3.415) 18(2.275,3.415) 19(1.625,3.415) 20(0.975,3.415) 21(0.325,3.415) 22(-0.325,3.415) 23(-0.975,3.415) 24(-1.625,3.415) 25(-2.275,3.415) 26(-2.925,3.415) 27(-3.575,3.415) 28(-4.225,3.415)
  silkscreen extent -5.25,-2.5 5.25,2.5
SurfaceMount(603) [mm]
  rect 0.7x0.9 smd: 1(-0.75,0) 2(0.75,0)
  silkscreen extent -0.2,-0.35 0.2,0.35, body extent -0.85,-0.48 0.85,0.48, height 0.9
SwitchTall-TL330 [mil] "Small SMDTall Tact Switch E-Switch TL330"
  rect 80x50 smd: 1(-90,80) 2(90,80) 3(-90,-80) 4(90,-80)
  silkscreen extent -141,-114 141,115
TestPoint#1 [mil]
  round 40 smd: 1(0,0)
  silkscreen extent -28,-28 28,28
TestPoint#2 [mil]
  round 40 smd: 1(-45,40)
  silkscreen extent -28,-28 28,28
TSSOP-16 [mm] "DEMUX & SHIFT REGISTER"
  rect 1.7x0.35 smd: 1(-2.85,2.275) 2(-2.85,1.625) 3(-2.85,0.975) 4(-2.85,0.325) 5(-2.85,-0.325) 6(-2.85,-0.975) 7(-2.85,-1.625) 8(-2.85,-2.275) 9(2.85,-2.275) 10(2.85,-1.625) 11(2.85,-0.975) 12(2.85,-0.325) 13(2.85,0.325) 14(2.85,0.975) 15(2.85,1.625) 16(2.85,2.275)
  silkscreen extent -2.98,-2.49 1.73,3.12, body extent -2.25,-2.55 2.25,2.55, height 1.2
"USB Minib (thru-hole)" [mm]
  rect 1.65x0.55 smd: 1(0,1.6) 2(0,0.8) 3(0,0) 4(0,-0.8) 5(0,-1.6)
  oval 2.2x1.8 hole 1.321: 6(0,3.65) 7(-2.9,3.65) 8(-2.9,-3.65) 9(0,-3.65)
  Keep-Out Layer region: -8.077,-5.512 -4.801,-5.512 -4.801,5.385 -8.077,5.385
  Keep-Out Layer region: -5.207,-1.6 -2.337,-1.6 -2.337,1.854 -5.207,1.854
  silkscreen extent -6.2,-4.95 1.39,4.95
WFDFN-6 [mm] "QFN, 6-Leads, Body 1.5x1.5mm (max), Pitch 0.50mm, IPC Medium Density"
  oval 0.8x0.25 smd: 1(-0.7,0.5) 2(-0.7,0) 3(-0.7,-0.5) 4(0.7,-0.5) 5(0.7,0) 6(0.7,0.5)
  silkscreen extent -1.77,-1.02 0.8,1.02, body extent -0.78,-0.77 0.77,0.78, height 0.8

## Part data
ANT1: library part AntennaConn
C1 C2 C3 C4 C5 C6 C7 C8 C11 C12 C13 C14 C15 C16 C17 C18 C19 C21 C22 C23 C24 C25 C26 C27 C28 C29 C30 C31 C32 C33 C34 C36 C37 C38 C39 C40 C41 C42 C43 C44 C45 C46: "Capacitor (Semiconductor SIM Model)"
C9 C10: library part Cap, "Capacitor"
D1 D9 D14 D15 D16 D17 D18 D19 D20 D21 D22 D23 D24 D25 D26 D27 D28 D29: library part LED
D2 D7 D30: library part SchottkeyDiode
D3 D5 D6: library part LED2, "Typical RED, GREEN, YELLOW, AMBER GaAs LED"
D4: library part SCHOTTKEY_DIODE_ARRAY
J1: library part "Header 5X2H", "Header, 5-Pin, Dual row, Right Angle"
J3: library part USB-ConnTH
J4: library part "Header 2", "Header, 2-Pin"
J5: library part "HEADERS 8X2"
J6: library part HCOMM/HMOT, "Header, 2X20, 50mil, IDC"
J7: library part MICRO_SD
J8: library part BatteryConnJST
R1 R2 R3 R4 R5 R6 R7 R8 R9 R10 R11 R12 R13 R16 R17 R18 R19 R20 R21 R22 R23 R24 R25 R26 R27 R28 R29 R30 R31 R32 R33 R34 R38 R39 R40 R41 R42 R43 R44 R45 R46 R47 R48 R49 R50 R51 R52 R53 R54 R55 R56 R57 R60: "Resistor"
R14 R15: library part Res1, "Resistor"
R58 R59: library part Res3, "Resistor"
SW1 SW2 SW3 SW4: library part Switch-TL330
TP1 TP2 TP3 TP4 TP5 TP6 TP7 TP8 TP9 TP10 TP11 TP12 TP13 TP14 TP15: library part TestPoint
U4: "shift register"
U5: library part TLC59116LEDDRIVER
U6: library part radio-nRF24L01P
U7: library part 1.8V_LDO
U9: library part "Audio Amp TPA741"
XTAL1 XTAL2 XTAL3: library part Crystal

## Via types
v1: diameter 35, hole 20, Top Layer to Bottom Layer, 404 vias
v2: diameter 25.98, hole 12.99, Top Layer to Bottom Layer, tented top, 17 vias
v3: diameter 260, hole 129, Top Layer to Bottom Layer, 2 vias
v4: diameter 129, hole 129, Top Layer to Bottom Layer, 2 vias

## Nets (pads, with @x,y where several pads share a name; then routed paths per layer and width w, separated by ;. In a path a pad name is that pad's centre, name@x,y a point inside that pad or via, vN(x,y) a via of type N, cw(c..) or ccw(c..) an arc to the next point about the centre after c; other vN are vias at no path point)
3.3V: C1.2 C2.2 C3.2 C4.2 C11.2 C12.2 C13.2 C14.2 C15.2 C16.2 C17.2 C18.2 C19.2 C28.2 C29.2 C30.1 C36.2 C37.2 D1.1 D6.1 D8.1 D9.1 D10.4 D11.4 D12.4 D13.4 D14.1 D15.1 D16.1 D17.1 D18.1 D19.1 D20.1 D21.1 D22.1 D23.1 D24.1 D25.1 D26.1 D27.1 D28.1 D29.1 IR1.3 IR2.3 IR3.3 IR4.3 IR5.3 IR6.3 IR7.3 IR8.3 J1.1 J4.2 J5.1 J6.1 J6.2 J7.4 L5.2 Q2.1 R1.1 R4.2 R5.2 R6.2 R7.2 R9.2 R34.2 R35.2 R36.2 R37.2 R38.2 R42.2 R57.2 R60.2 T1.2 T2.2 T3.2 T4.2 T5.2 T6.2 T7.2 T8.2 TP3.1 U1.3 U1.8 U1.20 U1.32 U1.36 U1.44 U1.56 U1.68 U1.81 U1.83 U1.84 U1.93 U1.98 U2.16 U4.16 U5.27 U6.7 U6.15 U6.18 U7.1 U7.6 U8.6 U8.14 U8.19 U8.26 U8.32 U8.34 | length 35122.8
  Top Layer w8: T3.2@2128,4052 2128,4137 2295,4304 2295,4745 2317,4767 C12.2@2337,4767 ; v1@2188,3714 2347,3555 IR3.3@2347,3412 ; C13.2@2302,3372 2278,3348 2278,3309 2641,2946 T4.2@2641,2713 ; C13.2@2304,3371 2309,3371 IR3.3@2348.34,3410.34 ; C12.2@2342.53,4763.19 IR2.3@2417.81,4763.19 ; IR2.3@2428.27,4762.39 2427.27,4759.39 IR2.3@2431.39,4759.39 ; IR2.3@2432,4766.12 2469,4803.12 2469,5020 R35.2@2470,5020 ; v1@2547,4319 2552,4314 J7.4@2815,4314 ; v1(2576,3975) 2582.5,3968.5 2807.5,3968.5 v1(2827,3949) ; T4.2@2644,2714.71 2693.29,2764 v1@2740,2764 ; v1(2901,4655) 2901,4714 2843,4772 v1(2843,4851) 2850,4851 2851,4850 2851,4858 2853,4860 v1(2982,4860) ; IR4.3@3240,2428 3316.07,2504.07 D6.1@3529.04,2504.07 ; C14.2@3240.61,2349.83 IR4.3@3240.61,2427.27 ; 3271.53,2926.47 R34.2@3271.53,2979 ; v1@3279,4953 3477,4953 ; v1(3289,3557) v1@3291,3555 ; C11.2@3373.19,5681.81 IR1.3@3403,5652 ; IR1.3@3425.39,5649.27 3502.53,5692.61 v1@3505,5694 ; v1@3477,4867 3477,4953 ; v1@3477,4983 3477,4953 ; v1@3528,3555 v1(3528,3558) ; v1(3672,3970) v1@3673,3969 ; D9.1@3853,3969 3884,4000 3905,4000 ; D13.4@3901,4040 3904.91,4043.91 D13.4@3905,4043.82 3905,4000 ; D19.1@3940.47,2870 3940.47,2927.47 ; D10.4@3965,3967 D10.4@3966,3968 ; D10.4@3966,3978 D10.4@3966,3968 ; 4006.53,2931.53 R38.2@4006.53,2989 ; D11.4@4036,4024 4036,4000 ; D12.4@4095,3956.18 4095,3985 4080,4000 4036,4000 ; D8.1@4374,2415.58 4395.58,2415.58 4420,2440 D1.1@4450,2440 ; D8.1@4376,2414 4376,2381 4469,2288 4511.88,2288 IR5.3@4574.61,2350.73 ; v1@4540,4130 4540,4147 4546,4153 v1(4737,4153) 4738,4153 4772,4187 4966,4187 v1(5023,4244) 5023,4459 v1(5024,4460) ; v1@4542,5240 4542,5177 4606,5113 4806,5113 v1@4829,5090 ; v1(4573,4932) 4692,4932 v1(4692,4933) ; IR5.3@4576,2352 4611,2387 4611,2458 4592.72,2476.28 D29.1@4592.72,2488.7 ; v1(4600,4521) 4746,4521 v1(4764,4539) ; v1@4762,4537 4765,4537 4832,4470 v1@4888,4470 ; 4781.53,2927.53 R42.2@4781.53,2984 ; v1@4886,4468 v1(4886,4471) ; v1@4886,4469 4890,4469 v1@4888,4467 ; v1(5060,3703) 5123,3703 5247,3579 5283,3579 v1(5307,3555) J1.1@5291.87,3528.13 ; TP3.1@5180,2570 5285.43,2644.76 T6.2@5290,2648 ; IR6.3@5555.53,3257.47 IR6.3@5572,3241 ; IR7.3@5648,4569 5690,4611 C18.2@5690,4630.31 ; 3905,4000 3965,4000 ; 3965,4000 D10.4@3965,3956.18 3966,3960 D10.4@3966,3968 ; 3965,4000 4036,4000
  Top Layer w15: 3452,3174 3776,3174 ; v1@3547,5016 v1(3701,5016) ; v1@3673,3969 D9.1@3853,3969 ; 4172,3174 4552,3174 ; 4552,3124 cw(c4752,3124) 4952,3124 ; IR5.3@4572,2351 4614,2351 4629,2336 4629,2310 4649,2290 4720.67,2290 4737.67,2307 v1@4815,2307 ; J4.2@4770,5480 4829,5421 v1@4829,5090 ; v1(5448,3087) 5448,3097 5446,3099 5446,3119 IR6.3@5569,3242 ; J5.1@5515.02,4070 5609,4070 5730,3949 5872,3949 5872,3754 5862,3744 5718.33,3744 5713.33,3739 v1@5617,3739 ; IR6.3@5571,3242 5518,3295 5518,3372 5661,3515 5661,3739 ; 4952,3124 ccw(c4752,3124) 4952,3124 ; 3452,3124 ccw(c3252,3124) 3452,3124 ; 4176,3127 ccw(c3976,3127) 4176,3127
  Top Layer w20: R35.2@2470,5020 2539,4951 2659,4951 2659,4880 2667.81,4871.19 2726.2,4871.19 2765,4909.98 2765,5199 v1(2768,5202) ; v1@2547,4317 2452,4317 2440,4329 2440,4593.83 2550,4703.83 2550,4831 v1(2571,4852) ; v1@3291,3555 v1@3528,3555 ; v1@4622,5751 4693,5751 4765,5679 C17.2@4765,5650 ; IR8.3@4762,5574.12 4762,5494 J4.2@4775,5481 ; IR8.3@4764.69,5580.69 C17.2@4764.69,5650 ; J5.1@5512,4070 J5.1@5515.02,4070 ; IR6.3@5572.73,3240.61 C16.2@5629.61,3240.61
  Bottom Layer w8: T3.2@2128,4052 2188,3992 v1@2188,3714 ; v1(2576,3975) 2574,3977 2503,3977 2457,3931 2457,3873.93 2441.69,3858.63 2441.69,3777.31 2448.72,3770.28 2497.72,3770.28 2498,3770 ; U6.18@2596.19,3853 2574,3853 2550,3877 2523,3877 2523,3873 2498,3848 2498,3770 ; T4.2@2641,2713 T4.2@2641.64,2712.36 ; U6.15@2650.63,3775.24 2650.69,3775.31 2647,3779 2609,3779 2605,3780 2561,3780 2551,3770 2498,3770 ; v1@2740,2764 v1(2740,2766) 2741,2763 2872,2632 3029,2632 3232.12,2428.88 3239,2428.88 IR4.3@3240.61,2427.27 ; U6.7@2767.76,3872.69 2785.69,3872.69 2795,3882 C29.2@2802,3882 ; C29.2@2810,3879.69 2810,3900 2826,3916 v1@2826,3947 ; C30.1@2842,4888.44 2842,4863 2854.56,4850.44 U7.6@2888.31,4850.44 ; C30.1@2845,4890 2860.56,4905.56 U7.1@2888.31,4905.56 ; Q2.1@2888.6,4545.43 2888.6,4580.6 2900,4592 R57.2@2900,4608 ; R57.2@2901,4619 v1(2901,4655) ; v1(2982,4860) C37.2@3015,4860 ; C37.2@3015,4860.31 C37.2@3015,4860 ; U8.14@3169.42,5054.43 3169.42,4988.42 3176,4981.83 3176,4952 ; U8.19@3267.84,5054.43 3267.84,4975.84 3278,4965.69 v1(3278,4952) 3176,4952 ; U8.34@3418.43,4825.1 3476,4825.1 ; U8.32@3418.43,4864.47 v1@3476,4864.47 ; U8.26@3418.43,4982.58 v1@3478,4982.58 ; 3465,5738 v1(3504,5690) ; v1@3475,4988 C36.2@3475,5030.31 ; v1(3477,4865) v1@3476,4864.47 ; L5.2@3525,4751.5 3524.9,4751.5 3524.9,4825.1 3476,4825.1 ; v1(3528,3558) 3527.88,3558.12 3527.88,3559 3528,3558.88 3549.44,3537.44 C19.2@3575,3537.44 ; U5.27@3574.47,3480.43 C19.2@3574.47,3533.47 ; T5.2@3950,2132 3950,2183 4034,2267 R37.2@4176,2267 4237,2206 4506,2206 4575,2275 IR5.3@4575,2351 ; 4049,5807 4055,5801 ; 4050,5800 T1.2@4050,5872 ; C1.2@4243,4475 4250,4468 4250,4460 4262,4448 4302.37,4448 4313.17,4458.8 4466.48,4458.8 4476.78,4448.5 4515,4448.5 ; U1.3@4362.77,4124.15 4461.85,4124.15 4464,4122 4464,4102 ; U1.8@4362.77,4222.57 4363.2,4223 4415.37,4223 4420.87,4228.5 4449.13,4228.5 4517,4296.37 4517,4446.5 4515,4448.5 ; U1.98@4464,4022 4464,4102 ; U2.16@4478.8,5207.57 4529.57,5207.57 4542,5220 v1@4542,5243 ; 4515,4449 4515,4448.5 ; U1.32@4542.89,4619.23 4542.89,4571.46 4533.07,4561.65 4533.07,4537.21 4550.35,4519.93 4595.93,4519.93 4621.63,4545.63 U1.36@4621.63,4619.23 ; U1.93@4562.57,4022.77 4562.57,4105.43 4538,4130 4470,4130 4464,4124 4464,4102 ; C3.2@4565,4762.56 4568,4765.56 4568,4819 4572.5,4823.5 v1@4572.5,4935.72 ; v1@4599,4518 4599,4486 4561.5,4448.5 4515,4448.5 ; R1.1@4667,3890 4695,3890 4704,3899 4704,3944 4714.69,3954.69 C2.2@4750,3954.69 ; v1@4735.78,4153.5 4766.89,4122.39 ; 4749.61,4105.11 4749.75,4105.25 ; C2.2@4750,3957 4750,3972 4759.43,3981.43 U1.83@4759.43,4022.77 U1.84@4739.74,4022.77 4739.74,4095.24 4749.75,4105.25 ; IR8.3@4759.39,5572.73 4759,5575 IR8.3@4764.69,5580.69 ; v1(4764,4539) 4779.11,4554.11 U1.44@4779.11,4619.23 4777.33,4621.01 4777.33,4658.65 4770.3,4665.68 4706.32,4665.68 4684.5,4687.5 4684.5,4725.5 4692,4733 4692,4751.28 4702.5,4761.78 4702.5,4786.22 4692,4796.72 4692,4917 4707,4932 4786,4932 4833,4979 4833,5049 4832,5050 v1@4832,5084 ; U1.81@4798.8,4022.77 4798.8,4070.86 4808.61,4080.67 4808.61,4105.11 4791.33,4122.39 4766.89,4122.39 ; v1@4886,4468 v1(4886,4471) ; v1@4886,4469 4890,4469 4900.2,4458.8 U1.56@4959.23,4458.8 4960.15,4459.72 R9.2@5052,4459.72 ; U4.16@4893.66,3495.43 4977.85,3495.43 4981.78,3491.5 5026.5,3491.5 5031.5,3496.5 5031.5,3549.78 5078,3596.28 5078,3636 5060,3654 v1(5060,3703) ; U1.68@4959.23,4222.57 5023,4222.57 ; v1(5023,4244) 5023,4222.57 ; C4.2@5056.57,4222.57 5023,4222.57 ; 5218.14,2711.14 T6.2@5287.64,2641.64 ; 5276,5205.29 T8.2@5358.36,5287.64 ; v1(5307,3555) 5307.5,3555.5 5307.5,3692.5 5353,3738 R4.2@5384,3738 ; R4.2@5383,3738.53 R5.2@5428,3738.53 R6.2@5473,3738.53 R7.2@5518,3738.53 5555.53,3738.53 5556,3739 v1(5618,3739) ; 5531,4943 R36.2@5531,5012 ; C37.2@3015,4860 3033.37,4860 3048.84,4875.47 3048.84,4884.16 U8.6@3097.57,4884.16 3099.35,4885.94 3150.94,4885.94 3176,4911 3176,4952 ; 3476,4825.1 v1@3476,4864.47 ; 4749.75,4105.25 4766.89,4122.39
  Bottom Layer w15: v1(3289,3320) 3282,3320 v1@3289,3327 ; v1@3485,4985 3508,4985 v1@3540.5,5017.5 ; v1@4805,2304 5446,2945 5446,3099 5448,3097 v1(5448,3087) ; IR7.3@5649.27,4574.61 5740,4574.61
  Bottom Layer w20: R35.2@2470,5020 2470,4952 v1@2571.5,4850.5 ; v1@2546.5,4317.5 2571,4293 2571,3980 v1@2574,3977 ; T2.2@2712,5359 2767,5304 2767,5203 v1(2768,5202) ; T2.2@2715,5365 2722,5358 2889,5358 3247,5716 3347,5716 3363,5732 3459,5732 3465,5738 3507,5780 3700,5780 ; v1@3289,3327 v1(3289,3557) ; v1@3528,3555 v1(3528,3558) 3528,3558.88 3539.28,3570.16 3539.28,3615.76 3549.83,3626.31 3595.43,3626.31 3626,3656.88 3626,3921 3700,3995 J6.2@3700,5189.98 ; J6.1@3700,5350.02 3700,5780 ; v1@4616,5751 4572,5751 4522,5801 4055,5801 3841,5801 3820,5780 3700,5780 ; v1@4627,5750 4690,5750 4786,5654 4824,5654 5349.5,5128.5 5349.5,5012.73 5419.23,4943 5531,4943 5739,4735 5739,4550 5836,4453 5836,4081.88 5824,4069.88 5824,4030.12 5836,4018.12 5836,3988 5872,3952 T7.2@5872,3950 ; IR7.3@5649.27,4574.61 IR7.3@5649.27,4574.73
  Bottom Layer w29.12: J6.2@3700,5189.98 J6.2@3701,5189.98 ; J6.2@3701,5185 J6.2@3701,5189.98 ; J6.1@3701,5333.02 J6.2@3701,5189.98
  other v1: 4806,2306 2189,3710 4528,4138 2550,4315 3478,4983 3548,5019 4831,5092 4542,5246 4619,5750
3.3V_FTDI: C10.2 D3.1 D5.1 R11.1 R16.1 U1.91 U3.4 U3.17 | length 3137.5
  Top Layer w8: D5.1@3664.04,2474.07 3679.04,2459.07 D3.1@3759.04,2459.07 ; D3.1@3762,2452 3790,2452 v1(3807,2435) ; v1(4299,3880) 4299,3905 4315,3921 v1(4589,3921)
  Bottom Layer w8: v1(3807,2435) C10.2@3845.31,2435 3845.31,2417.69 3851,2412 4060.75,2412 4105.16,2456.41 U3.17@4105.16,2505.55 ; U3.17@4105,2506 4105,2628 4069,2664 3927,2664 3899,2692 3899,2727.13 3900.43,2728.57 U3.4@3900.43,2774.45 3900.43,2828.57 3942.87,2871 4192.63,2871 4293,2971.37 4293,3623 4242.5,3673.5 4242.5,3780.5 4299,3837 v1(4299,3880) ; 4105,2625 4244.37,2625 4265,2625 4275,2635 R16.1@4327,2635 ; R16.1@4327.47,2636.47 R11.1@4327.47,2683 ; v1(4589,3921) 4590.89,3921 4601.94,3932.06 U1.91@4601.94,4022.77